# Altium PCB 红外学习模块钻石版尺寸图.PcbDoc
Units mm, origin at the board's own origin, x right, y up, seen from the top; angles counter-clockwise.
Board outline 36 x 24 mm, 2 copper layers (Top Layer, Bottom Layer); 14 components, 15 nets, 72 pads, 1 vias.
Unrouted connection lines stored in the file: 28.
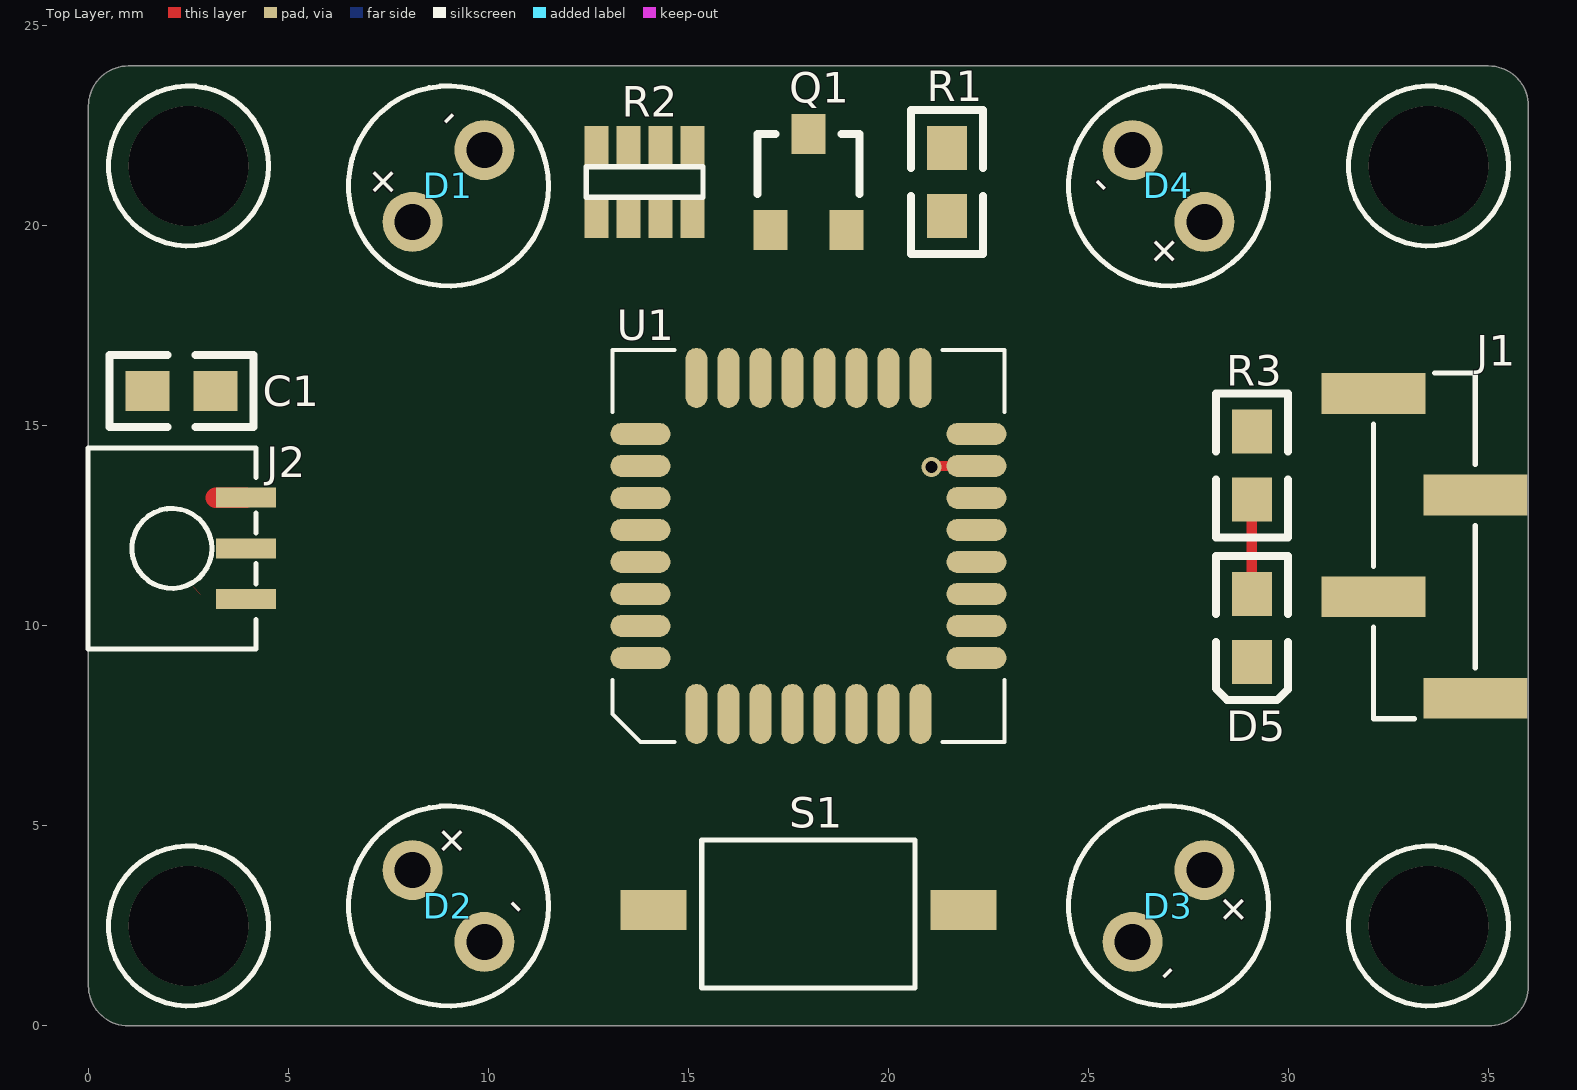
[diagram p0: Top Layer view]
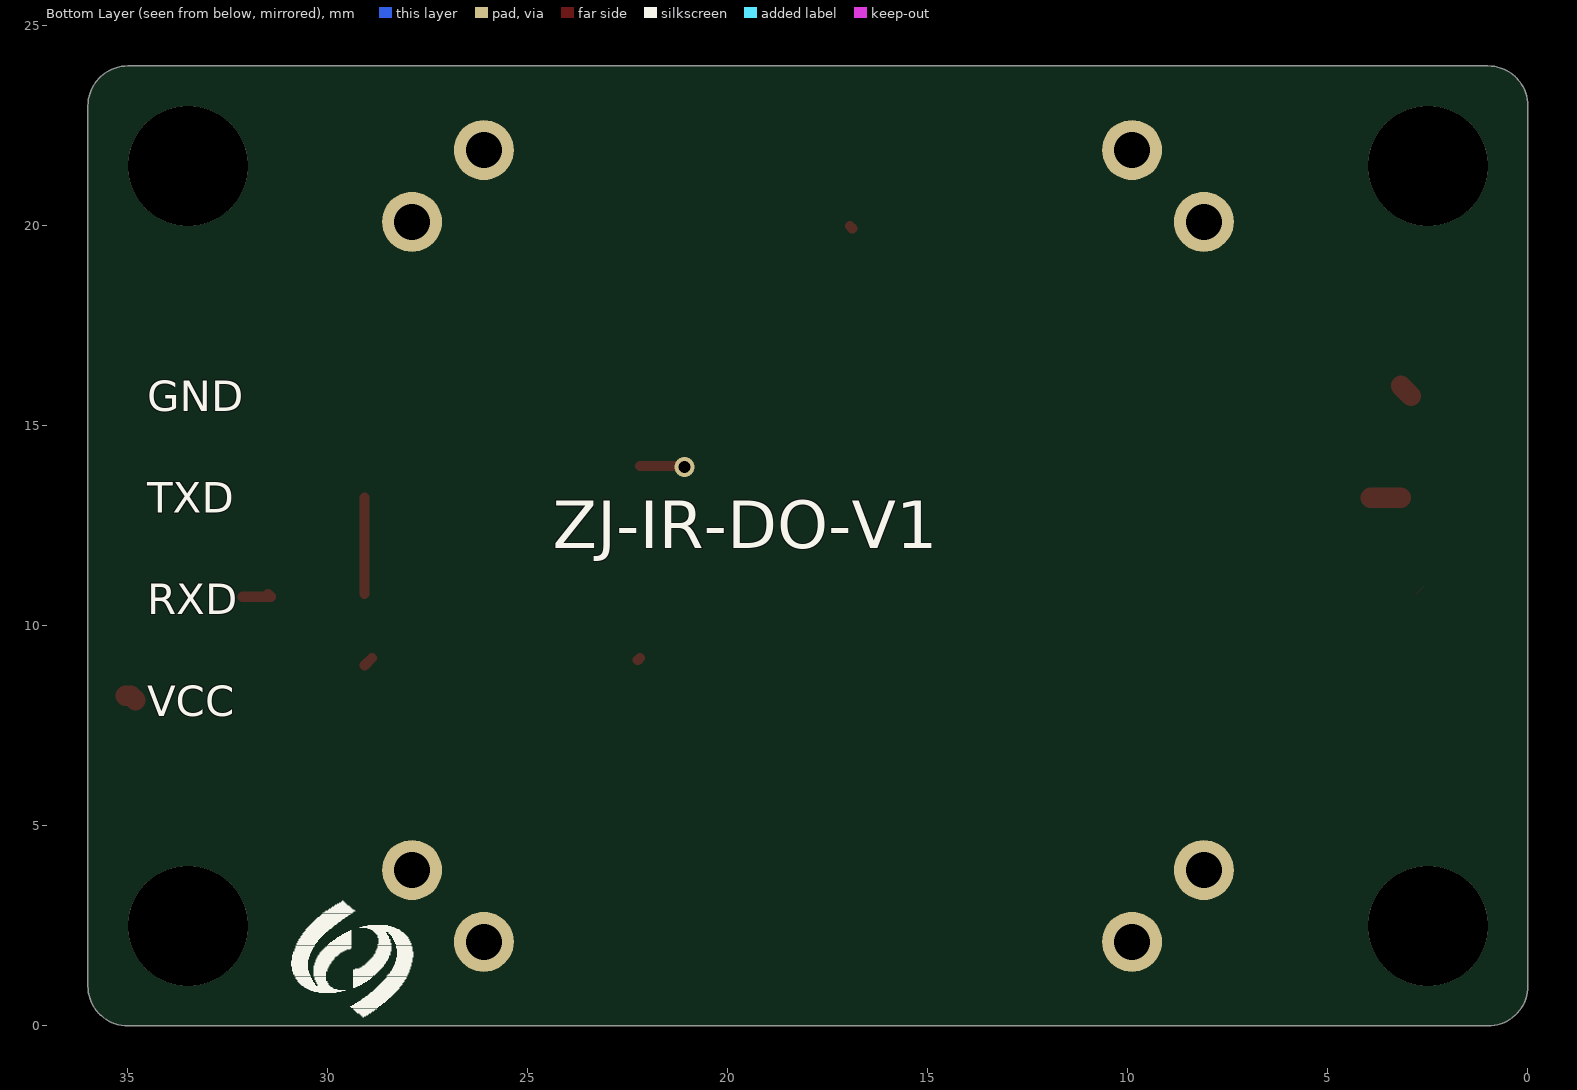
[diagram p1: Bottom Layer view, seen from below]

## Layer stack, top to bottom
Top Solder: solder mask 0.0102, Solder Resist, Dk 3.5
Top Layer: signal copper 0.0356
Dielectric 1: dielectric 0.32, FR-4, Dk 4.8
Bottom Layer: signal copper 0.0356
Bottom Solder: solder mask 0.0102, Solder Resist, Dk 3.5

## Board outline
0,1 0,23 cw(c1,23) 1,24 35,24 cw(c35,23) 36,23 36,1 cw(c35,1) 35,0 1,0 cw(c1,1)

## Design rules (kind name [scope] priority, off if disabled: settings)
Clearance [All] p1: gap=0.152
HoleSize [All] p1: absolutevalues=TRUE maxlimit=12.7 minlimit=0.025 maxpercent=80.000 minpercent=20.000
HoleToHoleClearance [All] p1: gap=0 allowstackedmicrovias=TRUE
MinimumSolderMaskSliver [All] p1: minsoldermaskwidth=0
PolygonConnect [All] p1: connectstyle=Relief reliefconductorwidth=0.254 reliefentries=4 polygonreliefangle="90 Angle" airgapwidth=0.254
RoutingVias [All] p1: holewidth=0.711 width=1.27 viastyle="Through Hole" minholewidth=0.711 minwidth=1.27 maxholewidth=0.711 maxwidth=1.27
SilkToSilkClearance [All] p1: silktosilkclearance=0
SilkToSolderMaskClearance [IsPad] p1: minsilkscreentomaskgap=0 clearancetoexposedcopper=TRUE
SolderMaskExpansion [All] p1: expansion=0.102
Width [All] p1: maxlimit=12.7 minlimit=0.152 preferedwidth=0.152
25 further rules are at their usual default settings.

## Components (designator, comment, footprint, x,y, rotation, side; value= is the part's Value field where it differs from the comment)
C1 "104" 0603 2.325,15.875 r0 top
D1 "LED" TSAL6400 9,21 r45 top
D2 "LED" TSAL6400 9,3 r315 top
D3 "LED" TSAL6400 27,3 r225 top
D4 "LED" TSAL6400 27,21 r135 top
D5 "LED" 0603L 29.083,9.945 r270 top
J1 "串口" "2.54MM 4P 单排立排母 正排母" 33.401,12 r270 top locked
J2 "红外接收" "红外接收管 SLTP312A" 4.187,11.938 r90 top (schematic designator J3)
Q1 "SS8050" SOT-23 18,21.098 r0 top
R1 "Res2" 0603 21.463,21.098 r90 top
R2 "60.4R" 0603-8P4R 14.097,21.098 r90 top
R3 "Res2" 0603 29.083,14.009 r90 top
S1 "NRST" "SWITCH-3*6 SMT" 18,2.9 r0 top
U1 "STC8G2K64S4-LQFP32" LQFP32 15.2,7.8 r90 top

## Footprints (in the part's own frame and the unit in brackets; to place one, negate y for a bottom-side part, rotate by r counter-clockwise, add the part's x,y. Pads: shape width x height; smd on the part's side, far side on the other; paste and mask are expansions set on the pad)
"2.54MM 4P 单排立排母 正排母" [mm]
  rect 1.02x2.6 smd: 1(-3.81,-1.27) 2(-1.27,1.27) 3(1.27,-1.27) 4(3.81,1.27)
  silkscreen extent -4.32,-1.27 4.32,1.27
0603 [mm]
  rect 1.1x1 smd: 1(-0.85,0) 2(0.85,0)
  silkscreen extent -1.8,-0.9 1.8,0.9
0603-8P4R [mil]
  rect 40x23.62 smd: 1(-35,55) 2(-35,23.5) 3(-35,-7.99) 4(-35,-39.49) 5(35,-39.49) 6(35,-7.99) 7(35,23.5) 8(35,55)
  silkscreen extent -15,-50 15,65
0603L [mm]
  rect 1.1x1 smd: 1(-0.85,0) 2(0.85,0)
  silkscreen extent -1.8,-0.9 1.8,0.9
LQFP32 [mm]
  oval 1.5x0.55 smd: 1(0,0) 2(0,-0.8) 3(0,-1.6) 4(0,-2.4) 5(0,-3.2) 6(0,-4) 7(0,-4.8) 8(0,-5.6) 17(8.4,-5.6) 18(8.4,-4.8) 19(8.4,-4) 20(8.4,-3.2) 21(8.4,-2.4) 22(8.4,-1.6) 23(8.4,-0.8) 24(8.4,0)
  oval 0.55x1.5 smd: 9(1.4,-7) 10(2.2,-7) 11(3,-7) 12(3.8,-7) 13(4.6,-7) 14(5.4,-7) 15(6.2,-7) 16(7,-7) 25(7,1.4) 26(6.2,1.4) 27(5.4,1.4) 28(4.6,1.4) 29(3.8,1.4) 30(3,1.4) 31(2.2,1.4) 32(1.4,1.4)
  silkscreen extent -0.7,-7.7 9.1,2.1
SOT-23 [mm]
  rect 0.85x1 smd: 1(-0.95,-1.2) 2(0.95,-1.2) 3(0,1.2)
  silkscreen extent -1.27,-0.3 1.27,1.2
"SWITCH-3*6 SMT" [mm]
  rect 1.65x1 smd: 1(-3.875,0) 2(3.875,0)
  silkscreen extent -2.67,-1.95 2.67,1.75
TSAL6400 [mm]
  round 1.5 hole 0.9: 1(-1.27,0) 2(1.27,0)
  silkscreen extent -2.5,-2.5 2.5,2.5
"红外接收管 SLTP312A" [mm]
  rect 0.5x1.5 smd: 1(1.27,0.25) 2(0,0.25) 3(-1.27,0.25)
  silkscreen extent -2.51,0 2.51,4.2

## Part data
C1: library part Cap, "Capacitor"
J1: library part "Header 4", "Header, 4-Pin"
J2: library part "Header 3", "Header, 3-Pin"
Q1: "NPN"
R1 R3: "Resistor"
R2: library part R-8P4R, "贴片网络排阻"
S1: library part SW-PB, "Switch"

## Free pads (board coordinates)
  round 3 hole 3 unplated: ""(2.5,2.5) ""(2.5,21.5) ""(33.5,2.5) ""(33.5,21.5)

## Via types
v1: diameter 0.5, hole 0.3, Top Layer to Bottom Layer, tented both sides, 1 vias

## Nets (pads, with @x,y where several pads share a name; then routed paths per layer and width w, separated by ;. In a path a pad name is that pad's centre, name@x,y a point inside that pad or via, vN(x,y) a via of type N, cw(c..) or ccw(c..) an arc to the next point about the centre after c; other vN are vias at no path point)
GND: C1.1 J1.1 J2.2 Q1.2 S1.2 U1.12
K1: S1.1 U1.1
LED: D5.2 U1.9 | length 0.3
  Top Layer w0.254: U1.9 U1.9@22.256,9.144 ; D5.2@28.9,9.2 D5.2@29.083,9.017
NetD1_1: D1.1 R2.1 | length 0.2
  Top Layer w0.508: D1.1@8.001,20.066 D1.1@8.144,20.209
NetD1_2: D1.2 D2.2 D3.2 D4.2 Q1.3
NetD2_1: D2.1 R2.2
NetD3_1: D3.1 R2.3
NetD4_1: D4.1 R2.4 | length 0.2
  Bottom Layer w0.508: D4.1@27.813,20.193 D4.1@27.94,20.066
NetD5_1: D5.1 R3.1 | length 2.4
  Top Layer w0.254: D5.1 R3.1 R3.1@29.083,13.208
NetQ1_1: Q1.1 R1.2 | length 0.1
  Top Layer w0.254: Q1.1@16.891,19.939 Q1.1@16.95,19.998
REC: J2.3 U1.15 | length 1.1
  Top Layer w0.254: v1@21.112,14 U1.15
  other v1: 21.082,13.97
RXD: J1.3 U1.13 | length 0.8
  Top Layer w0.254: J1.3@31.496,10.795 31.431,10.73 J1.3
SND: R1.1 U1.17
TXD: J1.2 U1.14
VCC: C1.2 J1.4 J2.1 R2.5 R2.6 R2.7 R2.8 R3.2 U1.10 | length 1.4
  Top Layer w0.508: C1.2@2.921,15.748 C1.2@3.175,16.002 ; 3.175,13.208 J2.1 ; J1.4@34.809,8.139 34.925,8.255 J1.4@35.052,8.255
pads on no net: U1.2 U1.3 U1.4 U1.5 U1.6 U1.7 U1.8 U1.11 U1.16 U1.18 U1.19 U1.20 U1.21 U1.22 U1.23 U1.24 U1.25 U1.26 U1.27 U1.28 U1.29 U1.30 U1.31 U1.32

## Silkscreen, mask and mechanical layers (free items; w line width, h text height)
Top Overlay:
  circle w0.127: c2.5,2.5 r2
  circle w0.127: c2.5,21.5 r2
  circle w0.127: c33.5,21.5 r2
  circle w0.127: c33.5,2.5 r2
Bottom Overlay:
  drawing of 292 lines, arcs and shapes, not listed
  text "GND" at 34.516,15.367 h0.76
  text "TXD" at 34.516,12.827 h0.76
  text "ZJ-IR-DO-V1" at 24.384,11.557 h2.03
  text "RXD" at 34.516,10.287 h0.76
  text "VCC" at 34.516,7.747 h0.76
Mechanical 1:
  the board outline again, w0.127

## Text inside footprints (layer, text, board x,y; h text height)
D1: Top Overlay "-" at 9.09,22.347 h0.76 r45; Top Overlay "+" at 7.294,20.551 h0.76 r45
D2: Top Overlay "-" at 10.347,2.91 h0.76 r315; Top Overlay "+" at 8.551,4.706 h0.76 r315
D3: Top Overlay "+" at 28.706,3.449 h0.76 r225; Top Overlay "-" at 26.91,1.653 h0.76 r225
D4: Top Overlay "+" at 27.449,19.294 h0.76 r135; Top Overlay "-" at 25.653,21.09 h0.76 r135